# Altium PCB copy SumoPCB.PcbDoc
Units mm, origin at the board's own origin, x right, y up, seen from the top; angles counter-clockwise.
Board outline 140 x 140 mm, 2 copper layers (Top Layer, Bottom Layer); 153 components, 179 nets, 629 pads, 44 vias.
Unrouted connection lines stored in the file: 407.
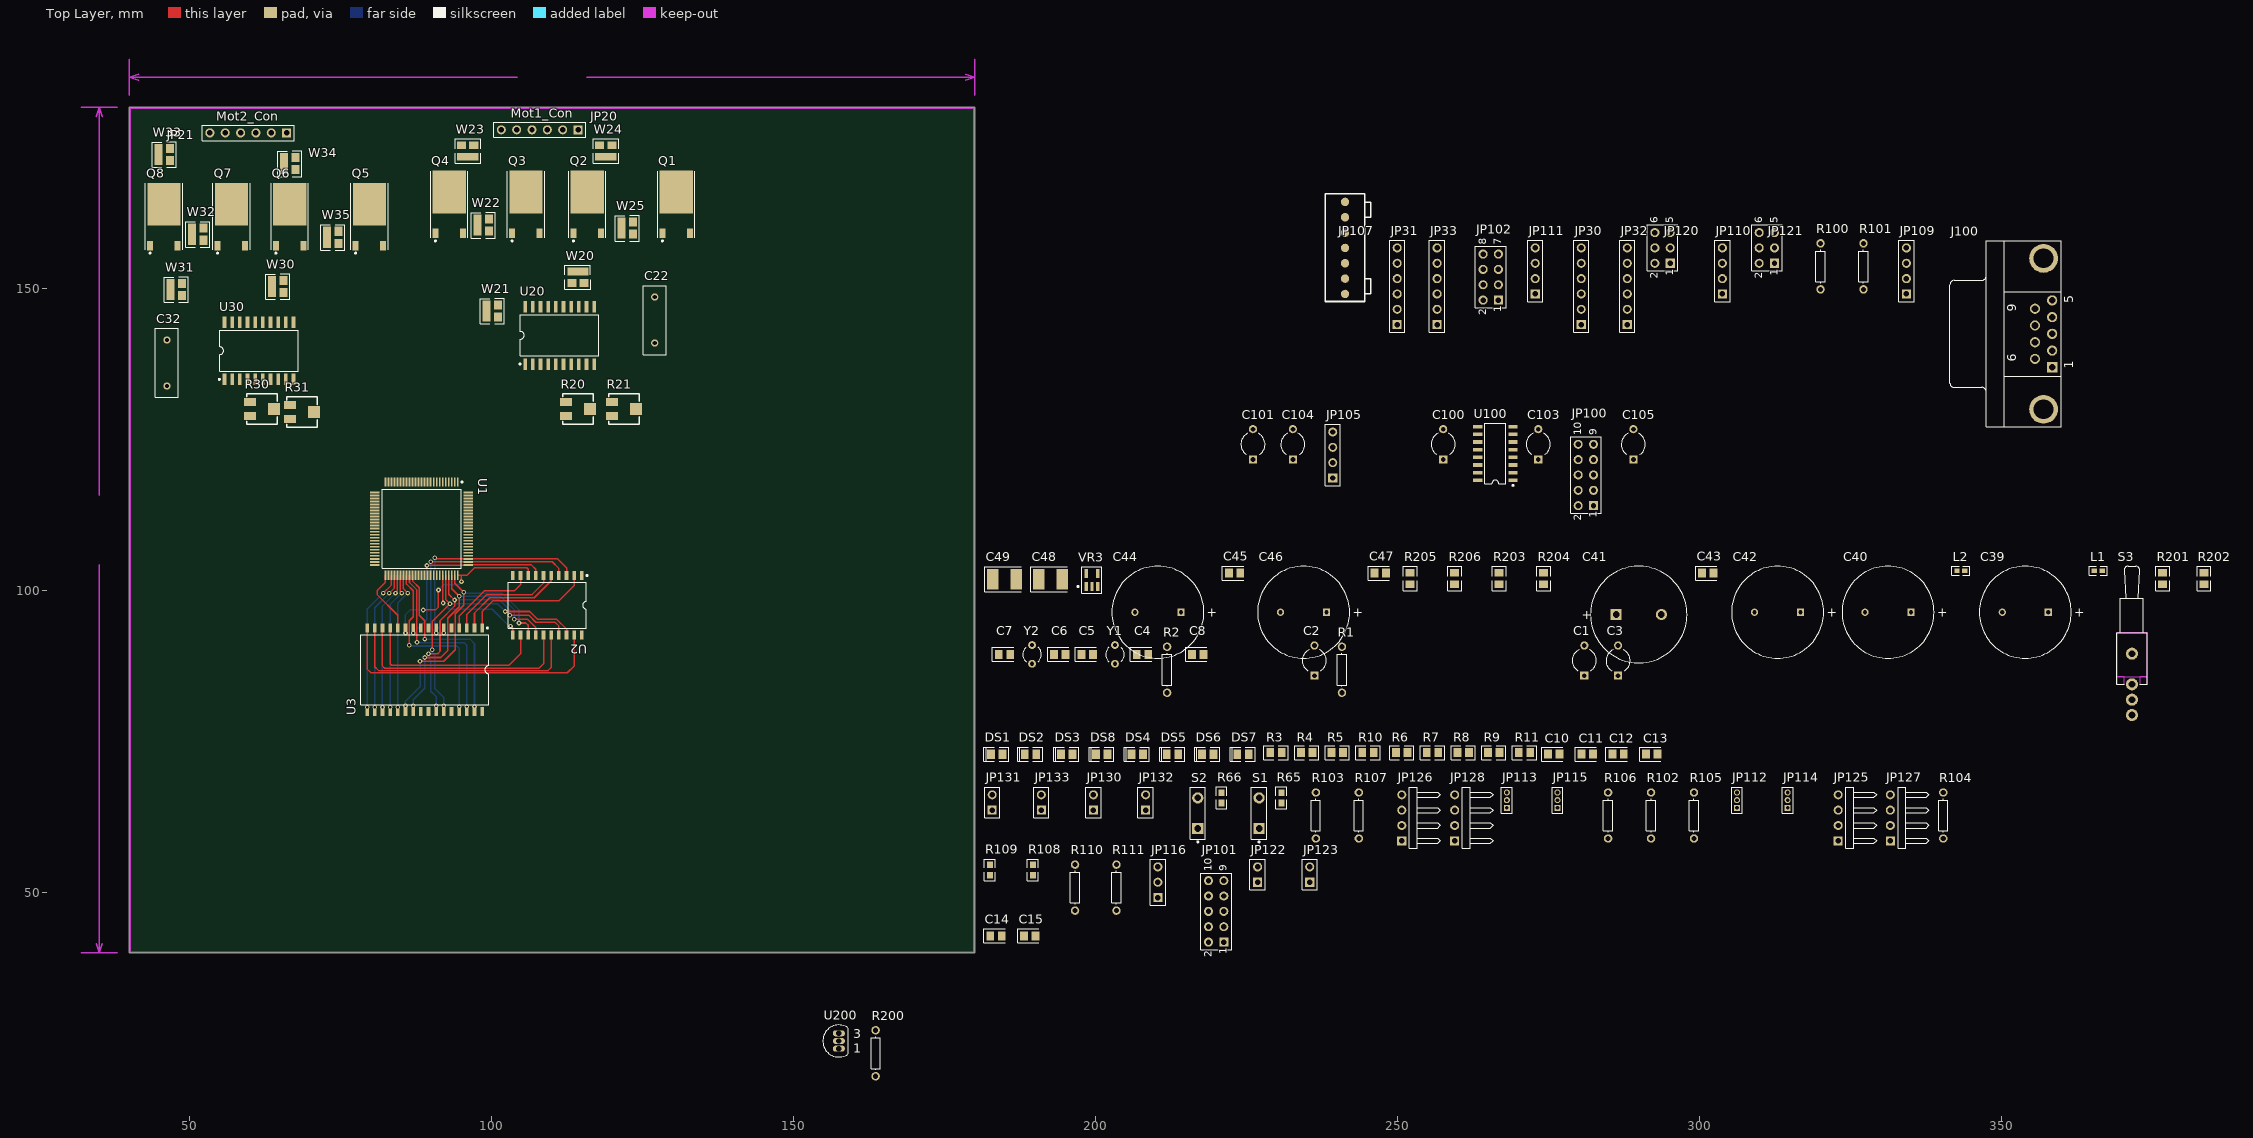
[diagram p0: Top Layer view]
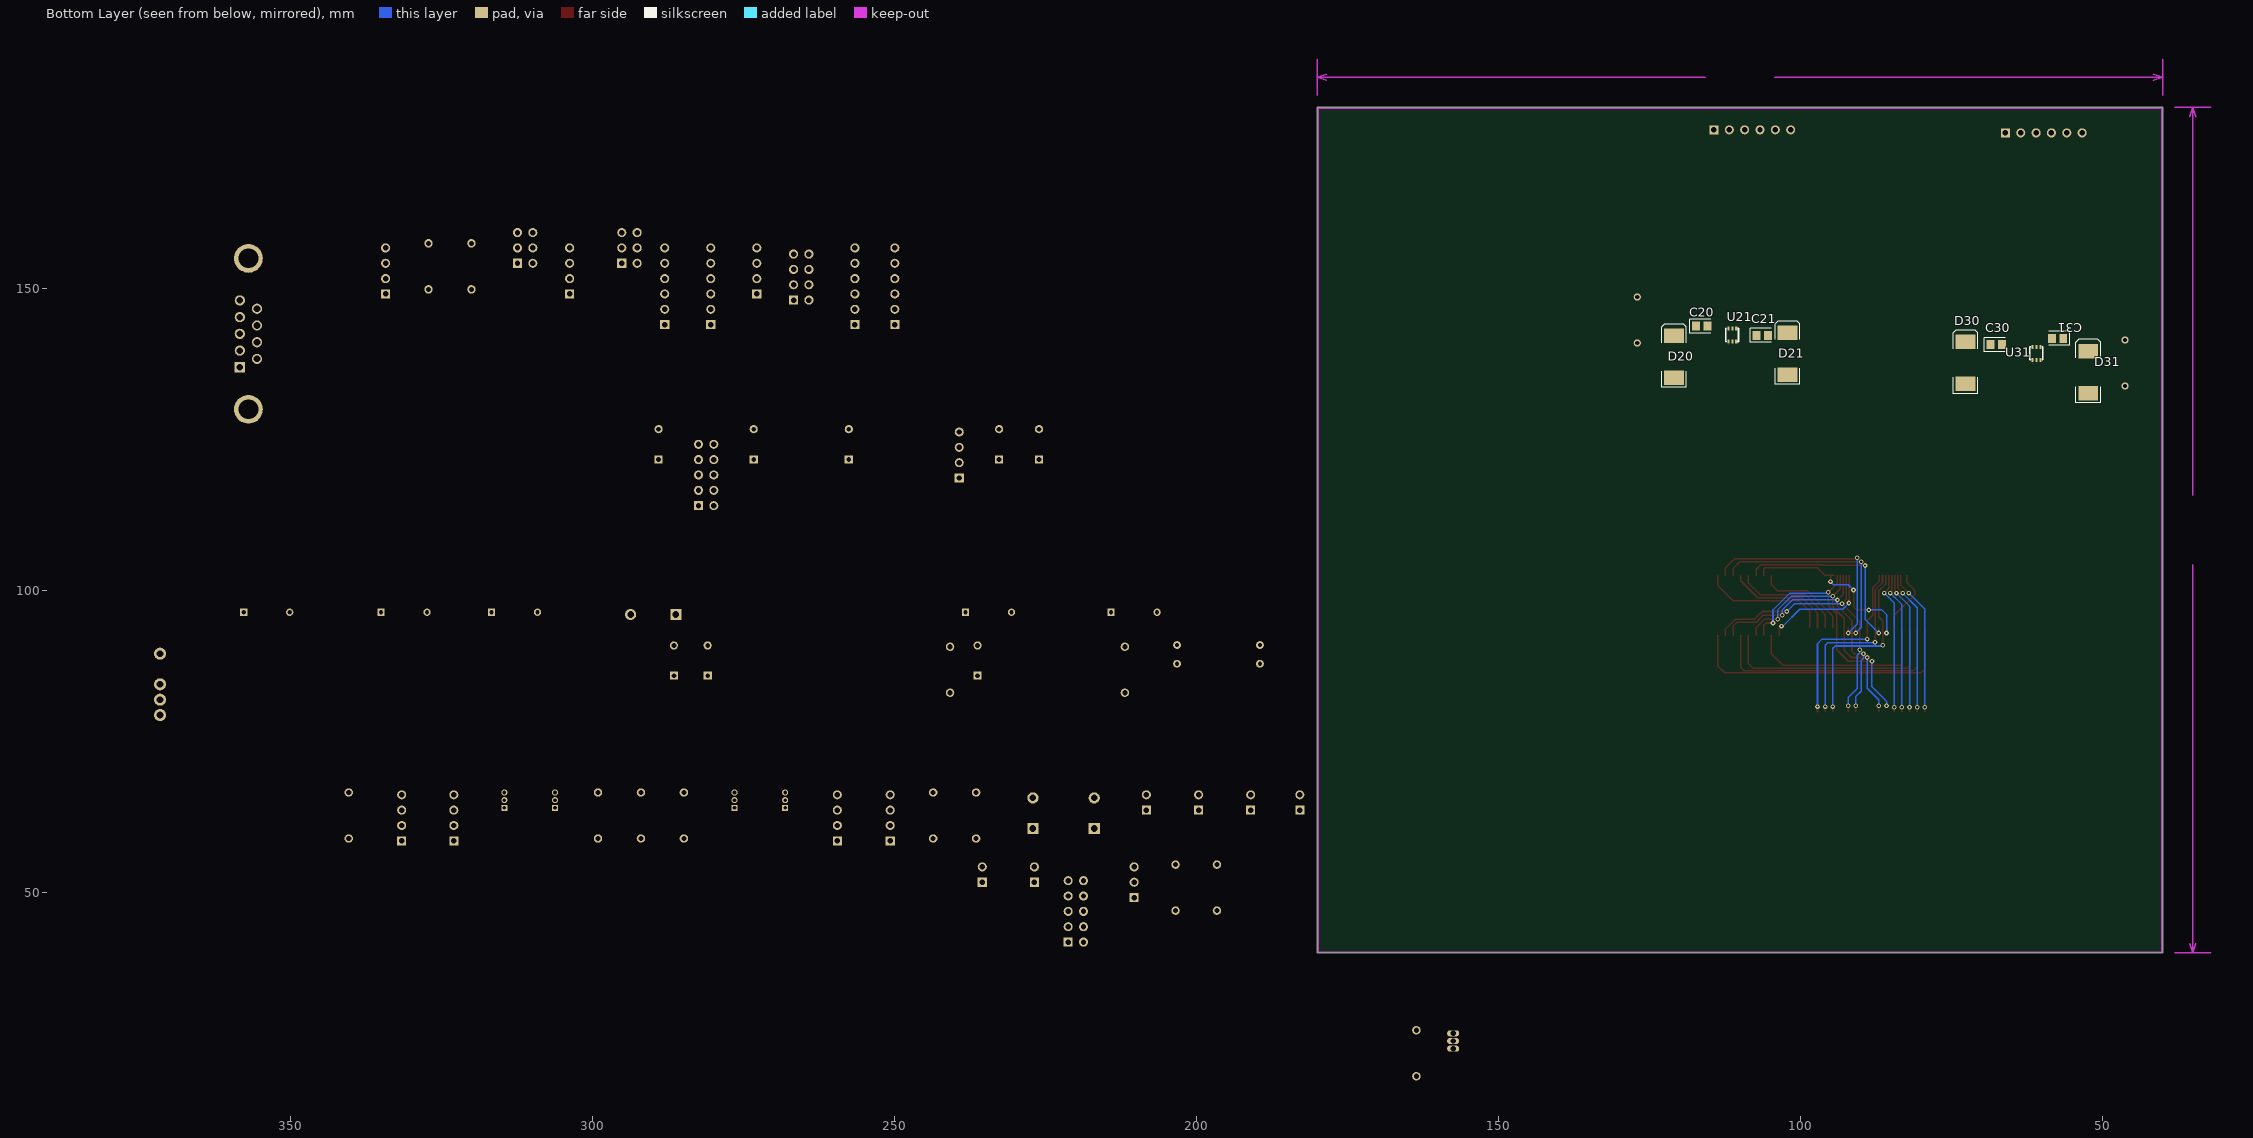
[diagram p1: Bottom Layer view, seen from below]

## Layer stack, top to bottom
Top Layer: signal copper 0.0356
Dielectric: dielectric 0.32, FR-4, Dk 4.8
Bottom Layer: signal copper 0.0356

## Board outline
40,40 180,40 180,180 40,180

## Classes and differential pairs
net class AD[0..7]: AD0 AD1 AD2 AD3 AD4 AD5 AD6 AD7
net class A[8..15]: A0 A1 A2 A3 A4 A5 A6 A7 A8 A9 A10 A11 A12 A13 A14 A15
component class "Power Regulation and Protection": C39 C40 C41 C42 C43 C44 C45 C46 C47 C48 C49 L1 L2 R200 R201 R202 R203 R204 R205 R206 S3 U200 VR3
component class "Motor Control": C20 C21 C22 C30 C31 C32 D20 D21 D30 D31 FH_1 FH_2 FH_3 FH_4 FH_5 FH_6 JP20 JP21 Q1 Q2 Q3 Q4 Q5 Q6 Q7 Q8 R20 R21 R30 R31 U20 U21 U30 U31 W20 W21 W22 W23 W24 W25 W30 W31 W32 W33 W34 W35
component class "Microcontroller and Memory": C1 C2 C3 C4 C5 C6 C7 C8 C10 C11 C12 C13 C14 C15 DS1 DS2 DS3 DS4 DS5 DS6 DS7 DS8 R1 R2 R3 R4 R5 R6 R7 R8 R9 R10 R11 U1 U2 U3 Y1 Y2
component class "Interfaces and Connectors": C100 C101 C103 C104 C105 J100 JP22 JP23 JP30 JP31 JP32 JP33 JP100 JP101 JP102 JP105 JP107 JP109 JP110 JP111 JP116 JP120 JP121 R100 R101 R108 R109 U100
component class "Interfaces and Connectors - Sensors": JP112 JP113 JP114 JP115 JP120 JP121 JP125 JP126 JP127 JP128 JP130 JP131 JP132 JP133 R65 R66 R100 R101 R102 R103 R104 R105 R106 R107 RP1 S1 S2

## Components (designator, comment, footprint, x,y, rotation, side; value= is the part's Value field where it differs from the comment)
C1 "Cap Tant" CAPR5-4X5 280.924,88.392 r90 top
C2 "Cap Tant" CAPR5-4X5 236.22,88.392 r90 top
C3 "Cap Tant" CAPR5-4X5 286.512,88.392 r90 top
C4 "22pF" CC2012-0805 207.772,89.408 r0 top
C5 "22pF" CC2012-0805 198.628,89.408 r0 top
C6 "22pF" CC2012-0805 194.056,89.408 r0 top
C7 "22pF" CC2012-0805 184.912,89.408 r0 top
C8 "100nF" CC2012-0805 216.916,89.408 r0 top
C10 "Cap Semi" CC2012-0805 275.844,72.898 r0 top
C11 "Cap Semi" CC2012-0805 281.432,72.898 r0 top
C12 "Cap Semi" CC2012-0805 286.512,72.898 r0 top
C13 "Cap Semi" CC2012-0805 292.1,72.898 r0 top
C14 "Cap Semi" CC2012-0805 183.515,42.799 r0 top
C15 "Cap Semi" CC2012-0805 189.103,42.799 r0 top
C20 "Cap Pol3" CC2012-0805 116.332,143.764 r180 bottom
C21 "Cap Pol3" CC2012-0805 106.282,142.24 r180 bottom
C22 "Cap" RAD-0.3 127,144.78 r90 top
C30 "Cap Pol3" CC2012-0805 67.564,140.716 r180 bottom
C31 "Cap Pol3" CC2012-0805 57.404,141.732 r0 bottom
C32 "Cap" RAD-0.3 46.228,137.668 r90 top
C39 "Cap Pol1" RB7.6-15 353.949,96.393 r0 top
C40 "Cap Pol1" RB7.6-15 331.216,96.393 r0 top
C41 "Cap Pol1" CAPPR7.5-16X35 289.941,96.012 r0 top
C42 "Cap Pol1" RB7.6-15 312.928,96.393 r0 top
C43 "Cap Pol3" CC2012-0805 301.371,102.87 r0 top
C44 "Cap Pol1" RB7.6-15 210.312,96.393 r0 top
C45 "Cap Pol3" CC2012-0805 223.012,102.87 r0 top
C46 "Cap Pol1" RB7.6-15 234.442,96.393 r0 top
C47 "Cap Pol3" CC2012-0805 247.142,102.87 r0 top
C48 "Tant" CC4532-1812 192.532,101.854 r0 top
C49 "Low ESR 0.3-10R Tant" CC4532-1812 184.912,101.854 r0 top
C100 "Cap Elec" CAPR5-4X5 257.556,124.206 r90 top
C101 "Cap Elec" CAPR5-4X5 226.06,124.206 r90 top
C103 "Cap Elec" CAPR5-4X5 273.304,124.206 r90 top
C104 "Cap Elec" CAPR5-4X5 232.664,124.206 r90 top
C105 "Cap Elec" CAPR5-4X5 289.052,124.206 r90 top
D20 "Diode" DSO-C2/X3.3 120.904,138.684 r90 bottom
D21 "Diode" DSO-C2/X3.3 102.108,139.192 r90 bottom
D30 "Diode" DSO-C2/X3.3 72.644,137.668 r90 bottom
D31 "Diode" DSO-C2/X3.3 52.324,136.144 r90 bottom
DS1 "Bat" "SMD _LED" 183.642,72.898 r0 top
DS2 "12V" "SMD _LED" 189.23,72.898 r0 top
DS3 "5V" "SMD _LED" 195.199,72.898 r0 top
DS4 "Diag1" "SMD _LED" 206.883,72.898 r0 top
DS5 "Diag2" "SMD _LED" 212.725,72.898 r0 top
DS6 "Diag3" "SMD _LED" 218.567,72.898 r0 top
DS7 "Diag4" "SMD _LED" 224.409,72.898 r0 top
DS8 "3V3" "SMD _LED" 201.041,72.898 r0 top
J100 "RS-232" DSUB1.385-2H9 347.472,142.494 r90 top
JP20 "Mot1_Con" HDR1X6 114.3,176.276 r180 top
JP21 "Mot2_Con" HDR1X6 66.04,175.768 r180 top
JP30 "SPI 2" HDR1X6 280.416,144.018 r90 top
JP31 "SPI 3" HDR1X6 249.936,144.018 r90 top
JP32 "SPI 4" HDR1X6 288.036,144.018 r90 top
JP33 "SPI 5" HDR1X6 256.54,144.018 r90 top
JP100 "JTAG" HDR2X5 282.448,114.046 r90 top
JP101 "ISP" HDR2X5 221.234,41.783 r90 top
JP102 "Voltage Outputs" HDR2X4 266.7,148.082 r90 top
JP105 "PORTL" HDR1X4 239.268,118.618 r90 top
JP107 "ADC Inputs" "KK 1x7 2.54mm" 241.3,149.098 r90 top
JP109 "I2C1" HDR1X4 334.264,149.098 r90 top
JP110 "I2C2" HDR1X4 303.784,149.098 r90 top
JP111 "I2C3" HDR1X4 272.796,149.098 r90 top
JP112 "IRD1" MHDR1X3 306.197,64.008 r90 top
JP113 "IRD2" MHDR1X3 268.097,64.008 r90 top
JP114 "IRD3" MHDR1X3 314.579,64.008 r90 top
JP115 "IRD4" MHDR1X3 276.479,64.008 r90 top
JP116 "Snd" HDR1X3 210.312,49.149 r90 top
JP120 "Mouse1" HDR2X3 295.148,154.178 r90 top
JP121 "Mouse2" HDR2X3 312.42,154.178 r90 top
JP122 "Batt Out" HDR1X2 226.822,51.689 r90 top
JP123 "Batt In" HDR1X2 235.458,51.689 r90 top
JP125 "Line1" HDR1X4H 322.961,58.547 r90 top
JP126 "Line2" HDR1X4H 250.698,58.547 r90 top
JP127 "Line3" HDR1X4H 331.597,58.547 r90 top
JP128 "Line4" HDR1X4H 259.461,58.547 r90 top
JP130 "Bmp1" HDR1X2 199.644,63.627 r90 top
JP131 "Bmp2" HDR1X2 182.88,63.627 r90 top
JP132 "Bmp3" HDR1X2 208.28,63.627 r90 top
JP133 "Bmp4" HDR1X2 191.008,63.627 r90 top
L1 "Inductor" C1005-0402 366.014,103.251 r0 top
L2 "Inductor" C1005-0402 343.281,103.251 r0 top
Q1 "IRFR2405" TO-252AA 130.556,162.56 r0 top
Q2 "IRFR2405" TO-252AA 115.824,162.56 r0 top
Q3 "IRFR2405" TO-252AA 105.664,162.56 r0 top
Q4 "IRFR2405" TO-252AA 92.964,162.56 r0 top
Q5 "IRFR2405" TO-252AA 79.756,160.528 r0 top
Q6 "IRFR2405" TO-252AA 66.548,160.528 r0 top
Q7 "IRFR2405" TO-252AA 56.896,160.528 r0 top
Q8 "IRFR2405" TO-252AA 45.72,160.528 r0 top
R1 "0K" AXIAL-0.3 240.792,86.868 r90 top
R2 "0K" AXIAL-0.3 211.836,86.868 r90 top
R3 "Res3" R2012-0805 229.87,73.152 r0 top
R4 "Res3" R2012-0805 234.95,73.152 r0 top
R5 "Res3" R2012-0805 240.03,73.152 r0 top
R6 "Res3" R2012-0805 250.698,73.152 r0 top
R7 "Res3" R2012-0805 255.778,73.152 r0 top
R8 "Res3" R2012-0805 260.858,73.152 r0 top
R9 "Res3" R2012-0805 265.938,73.152 r0 top
R10 "Res3" R2012-0805 245.11,73.152 r0 top
R11 "Res3" R2012-0805 271.018,73.152 r0 top
R20 "RPot SM" POT4MM-2 114.3,130.048 r0 top
R21 "RPot SM" POT4MM-2 121.92,130.048 r0 top
R30 "RPot SM" POT4MM-2 61.976,130.048 r0 top
R31 "RPot SM" POT4MM-2 68.58,129.54 r0 top
R65 "Res3" C1608-0603 230.759,65.659 r90 top
R66 "Res3" C1608-0603 220.853,65.659 r90 top
R100 "Res1" AXIAL-0.3 320.04,153.67 r90 top
R101 "Res1" AXIAL-0.3 327.152,153.67 r90 top
R102 "Res1" AXIAL-0.3 291.973,62.738 r90 top
R103 "Res1" AXIAL-0.3 236.474,62.738 r90 top
R104 "Res1" AXIAL-0.3 340.36,62.738 r90 top
R105 "Res1" AXIAL-0.3 299.085,62.738 r90 top
R106 "Res1" AXIAL-0.3 284.861,62.738 r90 top
R107 "Res1" AXIAL-0.3 243.586,62.738 r90 top
R108 "Res3" C1608-0603 189.611,53.721 r90 top
R109 "Res3" C1608-0603 182.499,53.721 r90 top
R110 "10K" AXIAL-0.3 196.596,50.8 r90 top
R111 "10K" AXIAL-0.3 203.454,50.8 r90 top
R200 "10K" AXIAL-0.3 163.576,23.368 r90 top
R201 "Res3" R2012-0805 376.682,101.981 r90 top
R202 "Res3" R2012-0805 383.54,101.981 r90 top
R203 "Res3" R2012-0805 266.827,101.981 r90 top
R204 "Res3" R2012-0805 274.193,101.981 r90 top
R205 "Res3" R2012-0805 252.095,101.981 r90 top
R206 "Res3" R2012-0805 259.461,101.981 r90 top
S1 "SW-PB" SPST-2 227.076,63.119 r90 top
S2 "SW-PB" SPST-2 216.916,63.119 r90 top
S3 "SW-SPDT" TL36WW15050 371.602,84.455 r0 top
U1 "ATmega2560" F-QFP14X14-G100/Z17N 88.392,110.236 r270 top
U2 "74HC373M" SO-G20/Y1.45 109.22,97.536 r180 top
U3 "K6R1008C1D" SO-G32/Y1.45 88.9,86.868 r180 top
U20 "HIP4081AIBZ" SOIC20A 111.252,142.24 r0 top
U21 "SN74LVC2G14" SC70 112.336,141.224 r180 bottom
U30 "HIP4081AIBZ" SOIC20A 61.468,139.7 r0 top
U31 "SN74LVC2G14" SC70 61.976,138.176 r180 bottom
U100 "MAX232" SO-G16/C5.85 266.192,122.682 r90 top
U200 "ZM33064" BCY-W3 157.48,25.4 r0 top
VR3 "TPS76333DBVR" SOT-23-5 199.39,101.727 r0 top
W20 "Jumper SMT 3Way" "Jumper SMT 3 Way" 113.284,149.352 r270 top
W21 "Jumper SMT 3Way" "Jumper SMT 3 Way" 102.616,145.288 r0 top
W22 "Jumper SMT 3Way" "Jumper SMT 3 Way" 101.092,159.512 r0 top
W23 "Jumper SMT 3Way" "Jumper SMT 3 Way" 97.028,175.26 r90 top
W24 "Jumper SMT 3Way" "Jumper SMT 3 Way" 119.888,175.26 r90 top
W25 "Jumper SMT 3Way" "Jumper SMT 3 Way" 124.968,159.004 r0 top
W30 "Jumper SMT 3Way" "Jumper SMT 3 Way" 67.056,149.352 r0 top
W31 "Jumper SMT 3Way" "Jumper SMT 3 Way" 50.292,148.844 r0 top
W32 "Jumper SMT 3Way" "Jumper SMT 3 Way" 53.848,157.988 r0 top
W33 "Jumper SMT 3Way" "Jumper SMT 3 Way" 48.26,171.196 r0 top
W34 "Jumper SMT 3Way" "Jumper SMT 3 Way" 69.088,169.672 r0 top
W35 "Jumper SMT 3Way" "Jumper SMT 3 Way" 76.2,157.48 r0 top
Y1 "16MHz" BCY-W2/D3.1 203.2,89.408 r0 top
Y2 "32kHz" BCY-W2/D3.1 189.484,89.408 r0 top

## Footprints (in the part's own frame and the unit in brackets; to place one, negate y for a bottom-side part, rotate by r counter-clockwise, add the part's x,y. Pads: shape width x height; smd on the part's side, far side on the other; paste and mask are expansions set on the pad)
AXIAL-0.3 [mm]
  round 1.4 hole 0.85: 1(-3.81,0) 2(3.81,0)
  silkscreen extent -2.77,-0.76 2.77,0.76
BCY-W2/D3.1 [mm]
  round 1.3 hole 0.7: 1(0,1.55) 2(0,-1.55)
  silkscreen extent -1.55,-1.19 1.55,1.17
BCY-W3 [mm]
  oval 2x1 hole 0.9: 1(0,-1.27) 2(0,0) 3(0,1.27)
  silkscreen extent -2.65,-2.65 1.55,2.65
C1005-0402 [mm]
  rect 0.9x0.7 smd: 1(-0.65,0) 2(0.65,0)
  silkscreen extent -1.5,-0.75 1.5,0.75
C1608-0603 [mm]
  rect 1.1x1 smd: 1(-0.85,0) 2(0.85,0)
  silkscreen extent -1.8,-0.9 1.8,0.9
CAPPR7.5-16X35 [mm]
  rect 1.85x1.85 hole 1.1: 1(-3.75,0)
  round 1.85 hole 1.1: 2(3.75,0)
  silkscreen extent -8,-8 8,8
CAPR5-4X5 [mm]
  rect 1.35x1.35 hole 0.8: 1(-2.5,0)
  round 1.35 hole 0.8: 2(2.5,0)
  silkscreen extent -1.69,-2 1.82,2
CC2012-0805 [mm]
  rect 1.3x1.5 smd: 1(-0.95,0) 2(0.95,0)
  silkscreen extent -2,-1.15 1.5,1.15
CC4532-1812 [mm]
  rect 1.9x3.4 smd: 1(-1.95,0) 2(1.95,0)
  silkscreen extent -3.3,-2.1 2.8,2.1
DSO-C2/X3.3 [mm]
  rect 2.4x3.3 smd: 1(-3.475,0) 2(3.475,0)
  silkscreen extent -5.08,-2.05 5.42,2.06
DSUB1.385-2H9 [mm] "Connector; D Subminiature; 9 Position; Right Angle; Pitch 1.385 mm"
  rect 1.69x1.69 hole 1.09: 1(-5.54,-10.92)
  round 1.69 hole 1.09: 2(-2.77,-10.92) 3(0,-10.92) 4(2.77,-10.92) 5(5.54,-10.92) 6(-4.155,-8.08) 7(-1.385,-8.08) 8(1.385,-8.08) 9(4.155,-8.08)
  round 4.76 hole 3.26: 10(-12.495,-9.5) 11(12.495,-9.5)
  silkscreen extent -15.4,-12.4 15.4,6
F-QFP14X14-G100/Z17N [mm]
  rect 1.55x0.3 smd: 1(-7.725,6) 2(-7.725,5.5) 3(-7.725,5) 4(-7.725,4.5) 5(-7.725,4) 6(-7.725,3.5) 7(-7.725,3) 8(-7.725,2.5) 9(-7.725,2) 10(-7.725,1.5) 11(-7.725,1) 12(-7.725,0.5) 13(-7.725,0) 14(-7.725,-0.5) 15(-7.725,-1) 16(-7.725,-1.5) 17(-7.725,-2) 18(-7.725,-2.5) 19(-7.725,-3) 20(-7.725,-3.5) 21(-7.725,-4) 22(-7.725,-4.5) 23(-7.725,-5) 24(-7.725,-5.5) 25(-7.725,-6) 51(7.725,-6) 52(7.725,-5.5) 53(7.725,-5) 54(7.725,-4.5) 55(7.725,-4) 56(7.725,-3.5) 57(7.725,-3) 58(7.725,-2.5) 59(7.725,-2) 60(7.725,-1.5) 61(7.725,-1) 62(7.725,-0.5) 63(7.725,0) 64(7.725,0.5) 65(7.725,1) 66(7.725,1.5) 67(7.725,2) 68(7.725,2.5) 69(7.725,3) 70(7.725,3.5) 71(7.725,4) 72(7.725,4.5) 73(7.725,5) 74(7.725,5.5) 75(7.725,6)
  rect 0.3x1.55 smd: 26(-6,-7.725) 27(-5.5,-7.725) 28(-5,-7.725) 29(-4.5,-7.725) 30(-4,-7.725) 31(-3.5,-7.725) 32(-3,-7.725) 33(-2.5,-7.725) 34(-2,-7.725) 35(-1.5,-7.725) 36(-1,-7.725) 37(-0.5,-7.725) 38(0,-7.725) 39(0.5,-7.725) 40(1,-7.725) 41(1.5,-7.725) 42(2,-7.725) 43(2.5,-7.725) 44(3,-7.725) 45(3.5,-7.725) 46(4,-7.725) 47(4.5,-7.725) 48(5,-7.725) 49(5.5,-7.725) 50(6,-7.725) 76(6,7.725) 77(5.5,7.725) 78(5,7.725) 79(4.5,7.725) 80(4,7.725) 81(3.5,7.725) 82(3,7.725) 83(2.5,7.725) 84(2,7.725) 85(1.5,7.725) 86(1,7.725) 87(0.5,7.725) 88(0,7.725) 89(-0.5,7.725) 90(-1,7.725) 91(-1.5,7.725) 92(-2,7.725) 93(-2.5,7.725) 94(-3,7.725) 95(-3.5,7.725) 96(-4,7.725) 97(-4.5,7.725) 98(-5,7.725) 99(-5.5,7.725) 100(-6,7.725)
  silkscreen extent -7.85,-6.55 6.55,6.83
HDR1X2 [mm] "Connector; Header; 2 Position"
  rect 1.5x1.5 hole 0.9: 1(0,0)
  round 1.5 hole 0.9: 2(2.54,0)
  silkscreen extent -1.27,-1.27 3.81,1.27
HDR1X3 [mm] "Connector; Header; 3 Position"
  rect 1.5x1.5 hole 0.9: 1(0,0)
  round 1.5 hole 0.9: 2(2.54,0) 3(5.08,0)
  silkscreen extent -1.27,-1.27 6.35,1.27
HDR1X4 [mm] "Connector; Header; 4 Position"
  rect 1.5x1.5 hole 0.9: 1(0,0)
  round 1.5 hole 0.9: 2(2.54,0) 3(5.08,0) 4(7.62,0)
  silkscreen extent -1.27,-1.27 8.89,1.27
HDR1X4H [mm] "Connector; Header; 4 Position; Right Angle"
  rect 1.5x1.5 hole 0.9: 1(0,0)
  round 1.5 hole 0.9: 2(2.54,0) 3(5.08,0) 4(7.62,0)
  silkscreen extent -1.27,-6.35 8.89,-1.27
HDR1X6 [mm] "Connector; Header; 6 Position"
  rect 1.5x1.5 hole 0.9: 1(0,0)
  round 1.5 hole 0.9: 2(2.54,0) 3(5.08,0) 4(7.62,0) 5(10.16,0) 6(12.7,0)
  silkscreen extent -1.27,-1.27 13.97,1.27
HDR2X3 [mm] "Connector; Header; 3x2 Position"
  rect 1.5x1.5 hole 0.9: 1(0,0)
  round 1.5 hole 0.9: 2(0,2.54) 3(2.54,0) 4(2.54,2.54) 5(5.08,0) 6(5.08,2.54)
  silkscreen extent -1.27,-1.27 6.35,3.81
HDR2X4 [mm] "Connector; Header; 4x2 Position"
  rect 1.5x1.5 hole 0.9: 1(0,0)
  round 1.5 hole 0.9: 2(0,2.54) 3(2.54,0) 4(2.54,2.54) 5(5.08,0) 6(5.08,2.54) 7(7.62,0) 8(7.62,2.54)
  silkscreen extent -1.27,-1.27 8.89,3.81
HDR2X5 [mm] "Connector; Header; 5x2 Position"
  rect 1.5x1.5 hole 0.9: 1(0,0)
  round 1.5 hole 0.9: 2(0,2.54) 3(2.54,0) 4(2.54,2.54) 5(5.08,0) 6(5.08,2.54) 7(7.62,0) 8(7.62,2.54) 9(10.16,0) 10(10.16,2.54)
  silkscreen extent -1.27,-1.27 11.43,3.81
"Jumper SMT 3 Way" [mm]
  rect 1.3x3.5 smd: 1(-3.45,1)
  rect 1.3x1.5 smd: 2(-1.55,2) 3(-1.55,0)
  silkscreen extent -4.5,-1.15 -0.5,3.1
"KK 1x7 2.54mm" [mil] "Molex KK 1x7 2.54mm 4A"
  round 55 smd: 1(0,0) 2(100,0) 3(200,0) 4(300,0) 5(400,0) 6(500,0) 7(600,0)
  silkscreen extent -49,-167 654,128
MHDR1X3 [mm] "Connector; Header; 3 Position"
  rect 1x1 hole 0.6: 1(0,0)
  round 1 hole 0.6: 2(1.27,0) 3(2.54,0)
  silkscreen extent -0.9,-0.9 3.44,0.9
POT4MM-2 [mm]
  rect 2x1.3 smd: CCW(-2,-1.15) CW(-2,1.15)
  rect 2x2 smd: W(2,0)
  silkscreen extent -2.5,-2.5 2.5,2.5
R2012-0805 [mm]
  rect 1.3x1.5 smd: 1(-0.95,0) 2(0.95,0)
  silkscreen extent -2,-1.15 2,1.15
RAD-0.3 [mm]
  round 1.2 hole 0.7: 1(-3.81,0) 2(3.81,0)
  silkscreen extent -5.71,-1.91 5.71,1.91
RB7.6-15 [mm]
  rect 1.2x1.2 hole 0.7: 1(3.81,0)
  round 1.2 hole 0.7: 2(-3.81,0)
  silkscreen extent -7.62,-7.62 7.62,7.62
SC70 [mm] "6 pin, 0.65 pitch"
  rect 0.35x0.66 smd: 1(0.425,0) 2(1.075,0) 3(1.725,0) 4(1.725,2.14) 5(1.075,2.14) 6(0.425,2.14)
  silkscreen extent 0,0 2.1,2.2
"SMD _LED" [mm]
  rect 1.3x1.6 smd: 1(0.95,0) 2(-0.95,0)
  silkscreen extent -2.13,-1.15 2,1.15
SO-G16/C5.85 [mm]
  rect 0.6x1.55 smd: 1(-4.445,-2.925) 2(-3.175,-2.925) 3(-1.905,-2.925) 4(-0.635,-2.925) 5(0.635,-2.925) 6(1.905,-2.925) 7(3.175,-2.925) 8(4.445,-2.925) 9(4.445,2.925) 10(3.175,2.925) 11(1.905,2.925) 12(0.635,2.925) 13(-0.635,2.925) 14(-1.905,2.925) 15(-3.175,2.925) 16(-4.445,2.925)
  silkscreen extent -5.39,-3.05 5,1.75
SO-G20/Y1.45 [mm]
  rect 0.6x1.45 smd: 1(-5.715,-4.925) 2(-4.445,-4.925) 3(-3.175,-4.925) 4(-1.905,-4.925) 5(-0.635,-4.925) 6(0.635,-4.925) 7(1.905,-4.925) 8(3.175,-4.925) 9(4.445,-4.925) 10(5.715,-4.925) 11(5.715,4.925) 12(4.445,4.925) 13(3.175,4.925) 14(1.905,4.925) 15(0.635,4.925) 16(-0.635,4.925) 17(-1.905,4.925) 18(-3.175,4.925) 19(-4.445,4.925) 20(-5.715,4.925)
  silkscreen extent -6.69,-5.05 6.48,3.8
SO-G32/Y1.45 [mm]
  rect 0.6x1.45 smd: 1(-9.525,-6.925) 2(-8.255,-6.925) 3(-6.985,-6.925) 4(-5.715,-6.925) 5(-4.445,-6.925) 6(-3.175,-6.925) 7(-1.905,-6.925) 8(-0.635,-6.925) 9(0.635,-6.925) 10(1.905,-6.925) 11(3.175,-6.925) 12(4.445,-6.925) 13(5.715,-6.925) 14(6.985,-6.925) 15(8.255,-6.925) 16(9.525,-6.925) 17(9.525,6.925) 18(8.255,6.925) 19(6.985,6.925) 20(5.715,6.925) 21(4.445,6.925) 22(3.175,6.925) 23(1.905,6.925) 24(0.635,6.925) 25(-0.635,6.925) 26(-1.905,6.925) 27(-3.175,6.925) 28(-4.445,6.925) 29(-5.715,6.925) 30(-6.985,6.925) 31(-8.255,6.925) 32(-9.525,6.925)
  silkscreen extent -10.58,-7.05 10.58,5.8
SOIC20A [mm]
  rect 0.6x1.9 smd: 1(-5.715,-4.75) 2(-4.445,-4.75) 3(-3.175,-4.75) 4(-1.905,-4.75) 5(-0.635,-4.75) 6(0.635,-4.75) 7(1.905,-4.75) 8(3.175,-4.75) 9(4.445,-4.75) 10(5.715,-4.75) 11(5.715,4.75) 12(4.445,4.75) 13(3.175,4.75) 14(1.905,4.75) 15(0.635,4.75) 16(-0.635,4.75) 17(-1.905,4.75) 18(-3.175,4.75) 19(-4.445,4.75) 20(-5.715,4.75)
  silkscreen extent -6.69,-4.87 6.5,3.4
SOT-23-5 [mm]
  rect 0.55x1.45 smd: 1(-0.95,-1.075) 2(0,-1.075) 3(0.95,-1.075) 4(0.95,1.075) 5(-0.95,1.075)
  silkscreen extent -2.42,-2.2 1.65,2.2
SPST-2 [mm]
  rect 1.85x1.85 hole 1.1: 1(-2.54,0)
  round 1.85 hole 1.1: 2(2.54,0)
  silkscreen extent -4.89,-1.27 4.28,1.27
TL36WW15050 [mm]
  round 2 hole 1.1: 1(0,0) 2(0,-2.54) 3(0,-5.08) M(0,5.08)
  Top Layer keep-out region: 1.27,0 2.54,0 2.54,1.27 1.27,1.27
  Top Layer keep-out region: -2.54,0 -1.27,0 -1.27,1.27 -2.54,1.27
  Top Layer keep-out region: -2.54,1.27 2.54,1.27 2.54,8.509 -2.54,8.509
  silkscreen extent -2.54,0 2.54,19.56
TO-252AA [mm] "D-PAK/TO-252-AA; 3 Leads (1 Cropped); Body 10.4 (inc. leads) x 6.7 mm (LxW max)"
  rect 1x1.6 smd: 1(-2.285,-3.425) 3(2.285,-3.425)
  rect 5.5x7.1 smd: 4(0,3.425)
  silkscreen extent -3.08,-4.8 3.08,6.88

## Part data
C1 C2 C3 C100 C101 C103 C104 C105: library part "Cap Pol2", "Polarized Capacitor (Axial)"
C4 C5 C6 C7 C8: library part Cap, "Capacitor"
C10 C11 C12 C13 C14 C15: "Capacitor (Semiconductor SIM Model)"
C20 C21 C30 C31 C43 C45 C47: "Polarized Capacitor (Surface Mount)"
C22 C32: "Capacitor"
C39 C40 C41 C42 C44 C46: "Polarized Capacitor (Radial)"
C48 C49: library part "Cap Semi", "Capacitor (Semiconductor SIM Model)"
D20 D21 D30 D31: "Default Diode"
DS1 DS2 DS3 DS4 DS5 DS6 DS7 DS8: library part LED3, "Typical BLUE SiC LED"
J100: library part "D Connector 9", "Receptacle Assembly, 9 Position, Right Angle"
JP20 JP21 JP30 JP31 JP32 JP33: library part "Header 6", "Header, 6-Pin"
JP100 JP101: library part "Header 5X2", "Header, 5-Pin, Dual row"
JP102: library part "Header 4X2", "Header, 4-Pin, Dual row"
JP105 JP107 JP109 JP110 JP111: library part "Header 4", "Header, 4-Pin"
JP112 JP113 JP114 JP115: library part MHDR1X3, "Header, 3-Pin"
JP116: library part "Header 3", "Header, 3-Pin"
JP120 JP121 JP122 JP123 JP130 JP131 JP132 JP133: library part "Header 2", "Header, 2-Pin"
JP125 JP126 JP127 JP128: library part "Header 4H", "Header, 4-Pin, Right Angle"
Q1 Q2 Q3 Q4 Q5 Q6 Q7 Q8: "HEXFET Power MOSFET"
R1 R2 R110 R111 R200: library part Res1, "Resistor"
R3 R4 R5 R6 R7 R8 R9 R10 R11 R65 R66 R100 R101 R102 R103 R104 R105 R106 R107 R108 R109 R201 R202 R203 R204 R205 R206: "Resistor"
R20 R21 R30 R31: "Square Trimming Potentiometer"
S1 S2: "Switch"
S3: "SPDT Subminiature Toggle Switch, Right Angle Mounting, Vertical Actuation"
U1: "Atmel ATmega2560 MCU"
U2: library part 74373, "Octal 8-bit D-type Latch"
U3: "Samsung 128Kx8 High-Speed Static RAM"
U20 U30: "80V/2.5A Peak, High Frequency Full Bridge FET Driver"
U21 U31: "Dual Schmitt-Trigger Inverter"
U100: "Maxim RS-232 Transceiver"
U200: "Generic 5V Supply Voltage Monitor"
Y1 Y2: library part XTAL, "Crystal Oscillator"

## Via types
v1: diameter 0.762, hole 0.381, Top Layer to Bottom Layer, 44 vias

## Nets (pads, with @x,y where several pads share a name; then routed paths per layer and width w, separated by ;. In a path a pad name is that pad's centre, name@x,y a point inside that pad or via, vN(x,y) a via of type N, cw(c..) or ccw(c..) an arc to the next point about the centre after c; other vN are vias at no path point)
3V3: C49.2 JP102.7 R10.2 VR3.5
"3V3 ENABLE": U1.79 VR3.3
5V: C1.1 C2.1 C3.1 C10.2 C11.2 C12.2 C13.2 C14.2 C15.2 C41.1 C43.1 C48.2 C105.1 JP30.2 JP31.2 JP32.2 JP33.2 JP100.4 JP100.7 JP101.2 JP102.5 JP107.3 JP109.2 JP110.2 JP111.2 JP112.3 JP113.3 JP114.3 JP115.3 JP120.2 JP121.2 L2.2 R1.2 R5.2 R11.1 R65.2 R66.2 R100.1 R101.1 R102.1 R103.1 R104.1 R105.1 R106.1 R107.1 R108.2 R109.2 R110.2 R111.2 R200.2 R205.1 U1.10 U1.31 U1.61 U1.80 U2.20 U3.8 U3.24 U21.5 U31.5 U100.16 U200.2 VR3.1
5VSENSE: R205.2 R206.1 U1.87
12V: C22.2 C32.2 C46.1 C47.1 D20.1 D21.1 D30.1 D31.1 JP102.1 JP102.3 JP116.2 R4.2 R203.1 U20.2 U20.7 U20.15 U20.16 U30.2 U30.7 U30.15 U30.16
12VSENSE: R203.2 R204.1 U1.88
A0: U2.2 U3.1 | length 21.4
  Top Layer w0.254: U3.1 98.425,96.52 100.203,98.298 111.125,98.298 113.665,100.838 U2.2
A1: U2.5 U3.2 | length 18.2
  Top Layer w0.254: U3.2 97.155,96.266 99.695,98.806 107.061,98.806 109.855,101.6 U2.5
A2: U2.6 U3.3 | length 18.3
  Top Layer w0.254: U3.3 95.885,96.012 99.187,99.314 106.68,99.314 108.585,101.219 U2.6
A3: U2.9 U3.4 | length 15.8
  Top Layer w0.254: U3.4 94.615,95.758 98.806,99.949 103.759,99.949 104.775,100.965 U2.9
A4: U2.12 U3.13 | length 31.5
  Top Layer w0.254: U3.13 83.185,87.884 83.439,87.63 102.87,87.63 104.775,89.535 U2.12
A5: U2.15 U3.14 | length 38.2
  Top Layer w0.254: U3.14 81.915,87.503 82.296,87.122 107.823,87.122 108.585,87.884 U2.15
A6: U2.16 U3.15 | length 41.5
  Top Layer w0.254: U3.15 80.645,87.376 81.28,86.741 109.347,86.741 109.855,87.249 U2.16
A7: U2.19 U3.16 | length 46.9
  Top Layer w0.254: U3.16 79.375,86.995 80.01,86.36 112.522,86.36 113.665,87.503 U2.19
A8: U1.53 U3.17 | length 24.2
  Top Layer w0.254: U3.17 v1(79.375,80.645) ; v1(82.042,99.568) 83.392,100.918 U1.53
  Bottom Layer w0.254: v1(79.375,80.645) 79.375,96.901 v1(82.042,99.568)
A9: U1.54 U3.18 | length 23.9
  Top Layer w0.254: U3.18 v1(80.645,80.645) ; v1(83.058,99.568) 83.892,100.402 U1.54
  Bottom Layer w0.254: v1(80.645,80.645) 80.645,97.155 v1(83.058,99.568)
A10: U1.55 U3.19 | length 23.6
  Top Layer w0.254: U3.19 v1(81.915,80.645) ; v1(84.074,99.568) 84.392,99.886 U1.55
  Bottom Layer w0.254: v1(81.915,80.645) 81.915,97.409 v1(84.074,99.568)
A11: U1.56 U3.20 | length 23.4
  Top Layer w0.254: U3.20 v1(83.185,80.645) ; U1.56 84.892,99.766 v1(85.09,99.568)
  Bottom Layer w0.254: v1(83.185,80.645) 83.185,97.663 v1(85.09,99.568)
A12: U1.57 U3.21 | length 23.5
  Top Layer w0.254: U3.21 v1(84.455,80.645) ; U1.57 85.392,100.282 v1(86.106,99.568)
  Bottom Layer w0.254: v1(84.455,80.645) 84.455,97.917 v1(86.106,99.568)
A13: U1.58 U3.29 | length 31.2
  Top Layer w0.254: U1.58 85.892,101.052 86.995,99.949 86.995,95.631 86.36,94.996 v1(86.36,90.932) ; U3.29 v1(94.615,80.772)
  Bottom Layer w0.254: v1(86.36,90.932) 86.487,90.805 94.234,90.805 94.615,90.424 v1(94.615,80.772)
A14: U1.59 U3.30 | length 31
  Top Layer w0.254: U1.59 86.392,101.314 87.63,100.076 v1(87.63,91.44) ; U3.30 v1(95.885,80.772)
  Bottom Layer w0.254: v1(87.63,91.44) 87.757,91.313 95.504,91.313 95.885,90.932 v1(95.885,80.772)
A15: U1.60 U3.31 | length 31.2
  Top Layer w0.254: U1.60 86.892,101.576 88.011,100.457 88.011,95.885 88.9,94.996 v1(88.9,91.948) ; U3.31 v1(97.155,80.772)
  Bottom Layer w0.254: v1(88.9,91.948) 96.393,91.948 97.155,91.186 v1(97.155,80.772)
AD0: U1.78 U2.3 U3.6 | length 37.7
  Top Layer w0.254: v1(90.551,105.41) 90.725,105.236 110.918,105.236 112.395,103.759 U2.3 ; v1(92.075,92.964) U3.6
  Bottom Layer w0.254: v1(90.551,105.41) 90.551,94.488 v1(92.075,92.964)
AD1: U1.77 U2.4 U3.7 | length 35.9
  Top Layer w0.254: v1(89.916,104.775) 89.955,104.736 110.021,104.736 111.125,103.632 U2.4 ; v1(90.805,92.964) U3.7
  Bottom Layer w0.254: v1(89.916,104.775) 89.916,93.853 v1(90.805,92.964)
AD2: U1.76 U2.7 U3.10 | length 32.4
  Top Layer w0.254: v1(86.995,92.964) U3.10 ; v1(89.281,104.14) 96.021,104.14 U1.76 106.584,104.236 107.315,103.505 U2.7
  Bottom Layer w0.254: v1(86.995,92.964) 89.281,95.25 v1(89.281,104.14)
AD3: U1.75 U2.8 U3.11 | length 31.6
  Top Layer w0.254: v1(85.725,92.964) U3.11@85.725,93.98 ; v1(88.646,96.774) 90.678,96.774 91.186,97.282 v1(91.186,100.076) ; U1.75 95.907,102.511 97.155,103.759 105.791,103.759 106.045,103.505 U2.8 ; v1(94.996,101.473) 94.996,102.511
  Bottom Layer w0.254: v1(85.725,92.964) 85.725,96.012 86.487,96.774 v1(88.646,96.774) ; v1(91.186,100.076) 92.075,100.965 94.488,100.965 v1(94.996,101.473)
AD4: U1.74 U2.13 U3.22 | length 44.5
  Top Layer w0.254: v1(88.138,88.265) 92.075,88.265 93.98,90.17 93.98,96.139 95.377,97.536 v1(95.377,99.695) 93.892,101.18 U1.74 ; v1(104.521,94.615) 105.664,94.615 106.045,94.234 U2.13
  Bottom Layer w0.254: v1(85.725,80.899) 85.725,81.661 88.138,84.074 v1(88.138,88.265) v1@88.011,88.138 ; v1(95.377,99.695) 95.504,99.568 101.727,99.568 104.521,96.774 v1(104.521,94.615)
AD5: U1.73 U2.14 U3.23 | length 44.8
  Top Layer w0.254: U3.23 v1(86.995,80.899) ; v1(88.9,88.9) 91.567,88.9 92.71,90.043 92.71,95.408 94.615,97.313 v1(94.615,99.06) 93.392,100.283 U1.73 ; v1(103.759,95.25) 105.918,95.25 107.315,93.853 U2.14
  Bottom Layer w0.254: v1(86.995,80.899) 86.995,81.915 88.9,83.82 v1(88.9,88.9) ; v1(94.615,99.06) 101.473,99.06 103.759,96.774 v1(103.759,95.25)
AD6: U1.72 U2.17 U3.26 | length 47.3
  Top Layer w0.254: v1(89.535,89.535) 91.059,89.535 91.44,89.916 91.44,94.996 93.853,97.409 v1(93.853,98.425) 92.892,99.386 U1.72 ; U3.26 v1(90.805,80.899) ; v1(102.997,95.885) 106.172,95.885 107.315,94.742 110.49,94.742 111.125,94.107 U2.17
  Bottom Layer w0.254: v1(89.535,89.535) 89.535,88.773 89.916,88.392 89.916,83.312 90.805,82.423 v1(90.805,80.899) ; v1(93.853,98.425) 101.346,98.425 102.997,96.774 v1(102.997,95.885)
AD7: U1.71 U2.18 U3.27 | length 46.9
  Top Layer w0.254: v1(90.17,90.17) 90.17,94.869 v1(93.091,97.79) 92.392,98.489 U1.71 ; U3.27 v1(92.075,80.899) ; v1(102.235,96.52) 106.299,96.52 107.569,95.25 110.744,95.25 112.395,93.599 U2.18
  Bottom Layer w0.254: v1(90.17,90.17) 90.17,89.662 90.551,89.281 90.551,83.82 92.075,82.296 v1(92.075,80.899) ; v1(93.091,97.79) 100.965,97.79 v1(102.235,96.52)
ADC0: JP107.4 U1.97
ADC1: U1.96
ADC2: U1.95
ADC3: U1.94
AGND: C8.2 JP107.2 R2.2 U1.99
ALE: U1.70 U2.11 | length 18.9
  Top Layer w0.254: v1@91.892,97.973 U1.70 ; v1(103.124,94.107) 103.505,93.726 U2.11
  Bottom Layer w0.254: v1(91.948,97.917) 92.964,96.901 100.076,96.901 102.87,94.107 v1(103.124,94.107)
AVCC: C8.1 R1.1 U1.100
BMP1: JP130.2 U1.35
BMP2: JP131.2 U1.36
BMP3: JP132.2 U1.37
BMP4: JP133.2 U1.38
DIAG1: R6.2 U1.47
DIAG2: R7.2 U1.48
DIAG3: R8.2 U1.49
DIAG4: R9.2 U1.50
GND: C1.2 C2.2 C3.2 C4.1 C5.1 C6.1 C7.1 C10.1 C11.1 C12.1 C13.1 C14.1 C15.1 C22.1 C32.1 C39.2 C40.2 C41.2 C42.2 C43.2 C44.2 C45.2 C46.2 C47.2 C48.1 C49.1 C103.2 C105.2 DS1.2 DS2.2 DS3.2 DS4.2 DS5.2 DS6.2 DS7.2 DS8.2 J100.5 JP30.1 JP31.1 JP32.1 JP33.1 JP100.2 JP100.10 JP101.3 JP101.4 JP101.6 JP101.8 JP101.10 JP102.2 JP102.4 JP102.6 JP102.8 JP107.1 JP109.1 JP110.1 JP111.1 JP112.2 JP113.2 JP114.2 JP115.2 JP116.1 JP120.1 JP121.1 JP122.2 JP123.2 JP125.2 JP125.3 JP126.2 JP126.3 JP127.2 JP127.3 JP128.2 JP128.3 JP130.1 JP131.1 JP132.1 JP133.1 Q1.3 Q3.3 Q5.3 Q7.3 R2.1 R20.CCW R21.CCW R30.CCW R31.CCW R202.2 R204.2 R206.2 S1.2 S2.2 S3.1 U1.11 U1.32 U1.62 U1.81 U2.1 U2.10 U3.5 U3.9 U3.25 U3.32 U20.4 U20.14 U20.17 U21.2 U30.4 U30.14 U30.17 U31.2 U100.15 U200.1 VR3.2 W22.3 W25.3 W32.3 W35.3
IRD1: JP112.1 U1.86
IRD2: JP113.1 U1.85
IRD3: JP114.1 U1.84
IRD4: JP115.1 U1.83
LINE1: JP125.1 R100.2 U1.67
LINE2: JP126.1 R102.2 U1.68
LINE3: JP127.1 R104.2 U1.69
LINE4: JP128.1 R106.2 U1.82
MOT1_A: JP20.3 W24.2
MOT1_A\: JP20.1 Q1.4 W25.2
MOT1_AHO_A: U20.11 W20.3
MOT1_AHS: C20.2 U20.12
MOT1_B: JP20.6 W23.3
MOT1_B\: JP20.4 Q3.4 W22.2
MOT1_BHO_B: U20.20 W21.2
MOT1_BHS: C21.2 U20.19
MOT1_CENT: JP20.2 JP20.5
MOT1_DC: W23.2 W24.3
MOT1_DC_DIS: U20.3
MOT1_GATE_A: Q2.1 W20.1
MOT1_GATE_B: Q4.1 W21.1
MOT1_PWM_A: U1.16 U20.5 U21.1 W20.2
MOT1_PWM_A\: Q1.1 U20.13 U21.6
MOT1_PWM_B: U1.17 U20.6 U21.3 W21.3
MOT1_PWM_B\: Q3.1 U20.18 U21.4
MOT2_A: JP21.3 W34.2
MOT2_A\: JP21.1 Q5.4 W35.2
MOT2_AHO_A: U30.11 W30.3
MOT2_AHS: C30.2 U30.12
MOT2_B: JP21.6 W33.3
MOT2_B\: JP21.4 Q7.4 W32.2
MOT2_BHO_B: U30.20 W31.2
MOT2_BHS: C31.2 U30.19
MOT2_CENT: JP21.2 JP21.5
MOT2_DC: W33.2 W34.3
MOT2_DC_DIS: U30.3
MOT2_GATE_A: Q6.1 W30.1
MOT2_GATE_B: Q8.1 W31.1
MOT2_PWM_A: U1.6 U30.5 U31.1 W30.2
MOT2_PWM_A\: Q5.1 U30.13 U31.6
MOT2_PWM_B: U1.7 U30.6 U31.3 W31.3
MOT2_PWM_B\: Q7.1 U30.18 U31.4
MOUSE1_X1: JP120.3 U1.63
MOUSE1_X2: JP120.5 U1.12
MOUSE1_Y1: JP120.4 U1.64
MOUSE1_Y2: JP120.6 U1.13
MOUSE2_X1: JP121.3 U1.65
MOUSE2_X2: JP121.5 U1.14
MOUSE2_Y1: JP121.4 U1.66
MOUSE2_Y2: JP121.6 U1.15
NetC20_1: C20.1 D20.2 U20.10
NetC21_1: C21.1 D21.2 U20.1
NetC30_1: C30.1 D30.2 U30.10
NetC31_1: C31.1 D31.2 U30.1
NetC40_1: C40.1 L1.2
NetC100_1: C100.1 U100.1
NetC100_2: C100.2 U100.3
NetC101_1: C101.1 U100.4
NetC101_2: C101.2 U100.5
NetC103_1: C103.1 U100.2
NetC104_1: C104.1 J100.10 J100.11
NetC104_2: C104.2 U100.6
NetCON1_1: 
NetCON1_2: 
NetCON1_5: 
NetCON1_7: 
NetD1_2: L2.1
NetDS1_1: DS1.1 R3.1
NetDS2_1: DS2.1 R4.1
NetDS3_1: DS3.1 R5.1
NetDS4_1: DS4.1 R6.1
NetDS5_1: DS5.1 R7.1
NetDS6_1: DS6.1 R8.1
NetDS7_1: DS7.1 R9.1
NetDS8_1: DS8.1 R10.1
NetJ100_1: J100.1 J100.4 J100.6
NetJ100_2: J100.2 U100.13
NetJ100_3: J100.3 U100.14
NetJ100_7: J100.7 J100.8
NetJP125_4: JP125.4 R101.2
NetJP126_4: JP126.4 R103.2
NetJP127_4: JP127.4 R105.2
NetJP128_4: JP128.4 R107.2
NetQ2_3: Q2.3 W25.1
NetQ2_4: Q2.4 W24.1
NetQ4_3: Q4.3 W22.1
NetQ4_4: Q4.4 W23.1
NetQ6_3: Q6.3 W35.1
NetQ6_4: Q6.4 W34.1
NetQ8_3: Q8.3 W32.1
NetQ8_4: Q8.4 W33.1
NetR20_CW: R20.CW R20.W U20.8
NetR21_CW: R21.CW R21.W U20.9
NetR30_CW: R30.CW R30.W U30.8
NetR31_CW: R31.CW R31.W U30.9
PE6: U1.8
PE7: U1.9
PL4: JP105.1 U1.39
PL5: JP105.2 U1.40
PL6: JP105.3 U1.41
PL7: JP105.4 U1.42
RD*: U1.52 U3.28
RESET: JP100.6 JP101.5 R11.2 R200.1 U1.30 U200.3
RXD: U1.45 U100.12
SCL: JP109.4 JP110.4 JP111.4 R111.1 U1.43
SD_CARD_DETECT: R108.1 U1.4
SD_CARD_WP: R109.1 U1.3
SD_TRI_STATE: U1.2
SDA: JP109.3 JP110.3 JP111.3 R110.1 U1.44
SOUND_OUT_PWM: JP116.3 U1.5
SPI_MISO: JP30.6 JP31.6 JP32.6 JP33.6 JP101.9 U1.22
SPI_MOSI: JP30.5 JP31.5 JP32.5 JP33.5 JP101.1 U1.21
SPI_SCK: JP30.4 JP31.4 JP32.4 JP33.4 JP101.7 U1.20
SPI_SS2*: JP30.3 U1.23
SPI_SS3*: JP31.3 U1.24
SPI_SS4*: JP32.3 U1.25
SPI_SS5*: JP33.3 U1.26
SPI_SS*: U1.19
SW1: R65.1 S1.1 U1.18
SW2: R66.1 S2.1 U1.27
TCK: JP100.1 U1.93
TDI: JP100.9 U1.90
TDO: JP100.3 U1.91
TMS: JP100.5 U1.92
TOSC1: C6.2 U1.29 Y2.1
TOSC2: C7.2 U1.28 Y2.2
TXD: U1.46 U100.11
VBAT: C39.1 C42.1 C44.1 C45.1 JP122.1 L1.1 R3.2 R201.1 S3.2
VBATIN: JP123.1 S3.3
VBATSENSE: R201.2 R202.1 U1.89
WR*: U1.51 U3.12 | length 10.7
  Top Layer w0.254: U1.51 82.392,101.315 81.026,99.949 81.026,99.314 84.455,95.885 U3.12
XTAL1: C5.2 U1.34 Y1.2
XTAL2: C4.2 U1.33 Y1.1
pads on no net: J100.9 JP100.8 JP107.5 JP107.6 JP107.7 S3.M U1.1 U1.98 U100.7 U100.8 U100.9 U100.10 VR3.4

## Keep-outs
Keep-Out Layer:
  lines w0.254: 32,40 38,40 ; 32,180 38,180 ; 34.492,41.524 35,40 ; 34.492,178.476 35,180 ; 35,104.261 35,40 ; 35,115.739 35,180 ; 35.508,41.524 35,40 ; 35.508,178.476 35,180 ; 40,182 40,188 ; 41.524,184.492 40,185 ; 41.524,185.508 40,185 ; 104.261,185 40,185 ; 115.739,185 180,185 ; 178.476,184.492 180,185 ; 178.476,185.508 180,185 ; 180,182 180,188 ; 40.132,40.132 40.132,179.832 179.832,179.832 179.832,40.132 40.132,40.132
  text "140 (mm)" at 104.515,184.086 h1.52
  text "140 (mm)" at 35.914,104.515 h1.52 r90

## Text inside footprints (layer, text, board x,y; h text height)
C39: Top Overlay "+" at 362.081,95.656 h1.5
C40: Top Overlay "+" at 339.348,95.656 h1.5
C41: Top Overlay "+" at 280.466,95.262 h1.5
C42: Top Overlay "+" at 321.06,95.656 h1.5
C44: Top Overlay "+" at 218.444,95.656 h1.5
C46: Top Overlay "+" at 242.574,95.656 h1.5
J100: Top Overlay "6" at 352.447,137.839 h1.5 r90; Top Overlay "9" at 352.447,146.149 h1.5 r90; Top Overlay "5" at 361.847,147.534 h1.5 r90; Top Overlay "1" at 361.847,136.704 h1.5 r90
JP100: Top Overlay "2" at 280.416,111.506 h1.27 r90; Top Overlay "1" at 282.956,112.014 h1.27 r90; Top Overlay "9" at 282.956,125.73 h1.27 r90; Top Overlay "10" at 280.416,125.73 h1.27 r90
JP101: Top Overlay "2" at 219.202,39.243 h1.27 r90; Top Overlay "1" at 221.742,39.751 h1.27 r90; Top Overlay "9" at 221.742,53.467 h1.27 r90; Top Overlay "10" at 219.202,53.467 h1.27 r90
JP102: Top Overlay "8" at 264.668,157.226 h1.27 r90; Top Overlay "7" at 267.208,157.226 h1.27 r90; Top Overlay "1" at 267.208,146.05 h1.27 r90; Top Overlay "2" at 264.668,145.542 h1.27 r90
JP120: Top Overlay "1" at 295.656,152.146 h1.27 r90; Top Overlay "2" at 293.116,151.638 h1.27 r90; Top Overlay "5" at 295.656,160.782 h1.27 r90; Top Overlay "6" at 293.116,160.782 h1.27 r90
JP121: Top Overlay "1" at 312.928,152.146 h1.27 r90; Top Overlay "2" at 310.388,151.638 h1.27 r90; Top Overlay "5" at 312.928,160.782 h1.27 r90; Top Overlay "6" at 310.388,160.782 h1.27 r90
U200: Top Overlay "3" at 159.901,25.867 h1.5; Top Overlay "1" at 159.901,23.421 h1.5